# Altium PCB PCB.PcbDoc (part 2 of 3)
Units mm, origin at the board's own origin, x right, y up, seen from the top; angles counter-clockwise.
Board outline 202.56 x 137.16 mm, 4 copper layers (Top Layer, Layer 1, Layer 2, Bottom Layer), stack 0.603 mm thick; 171 components, 95 nets, 481 pads, 76 vias.
Unrouted connection lines stored in the file: 155.
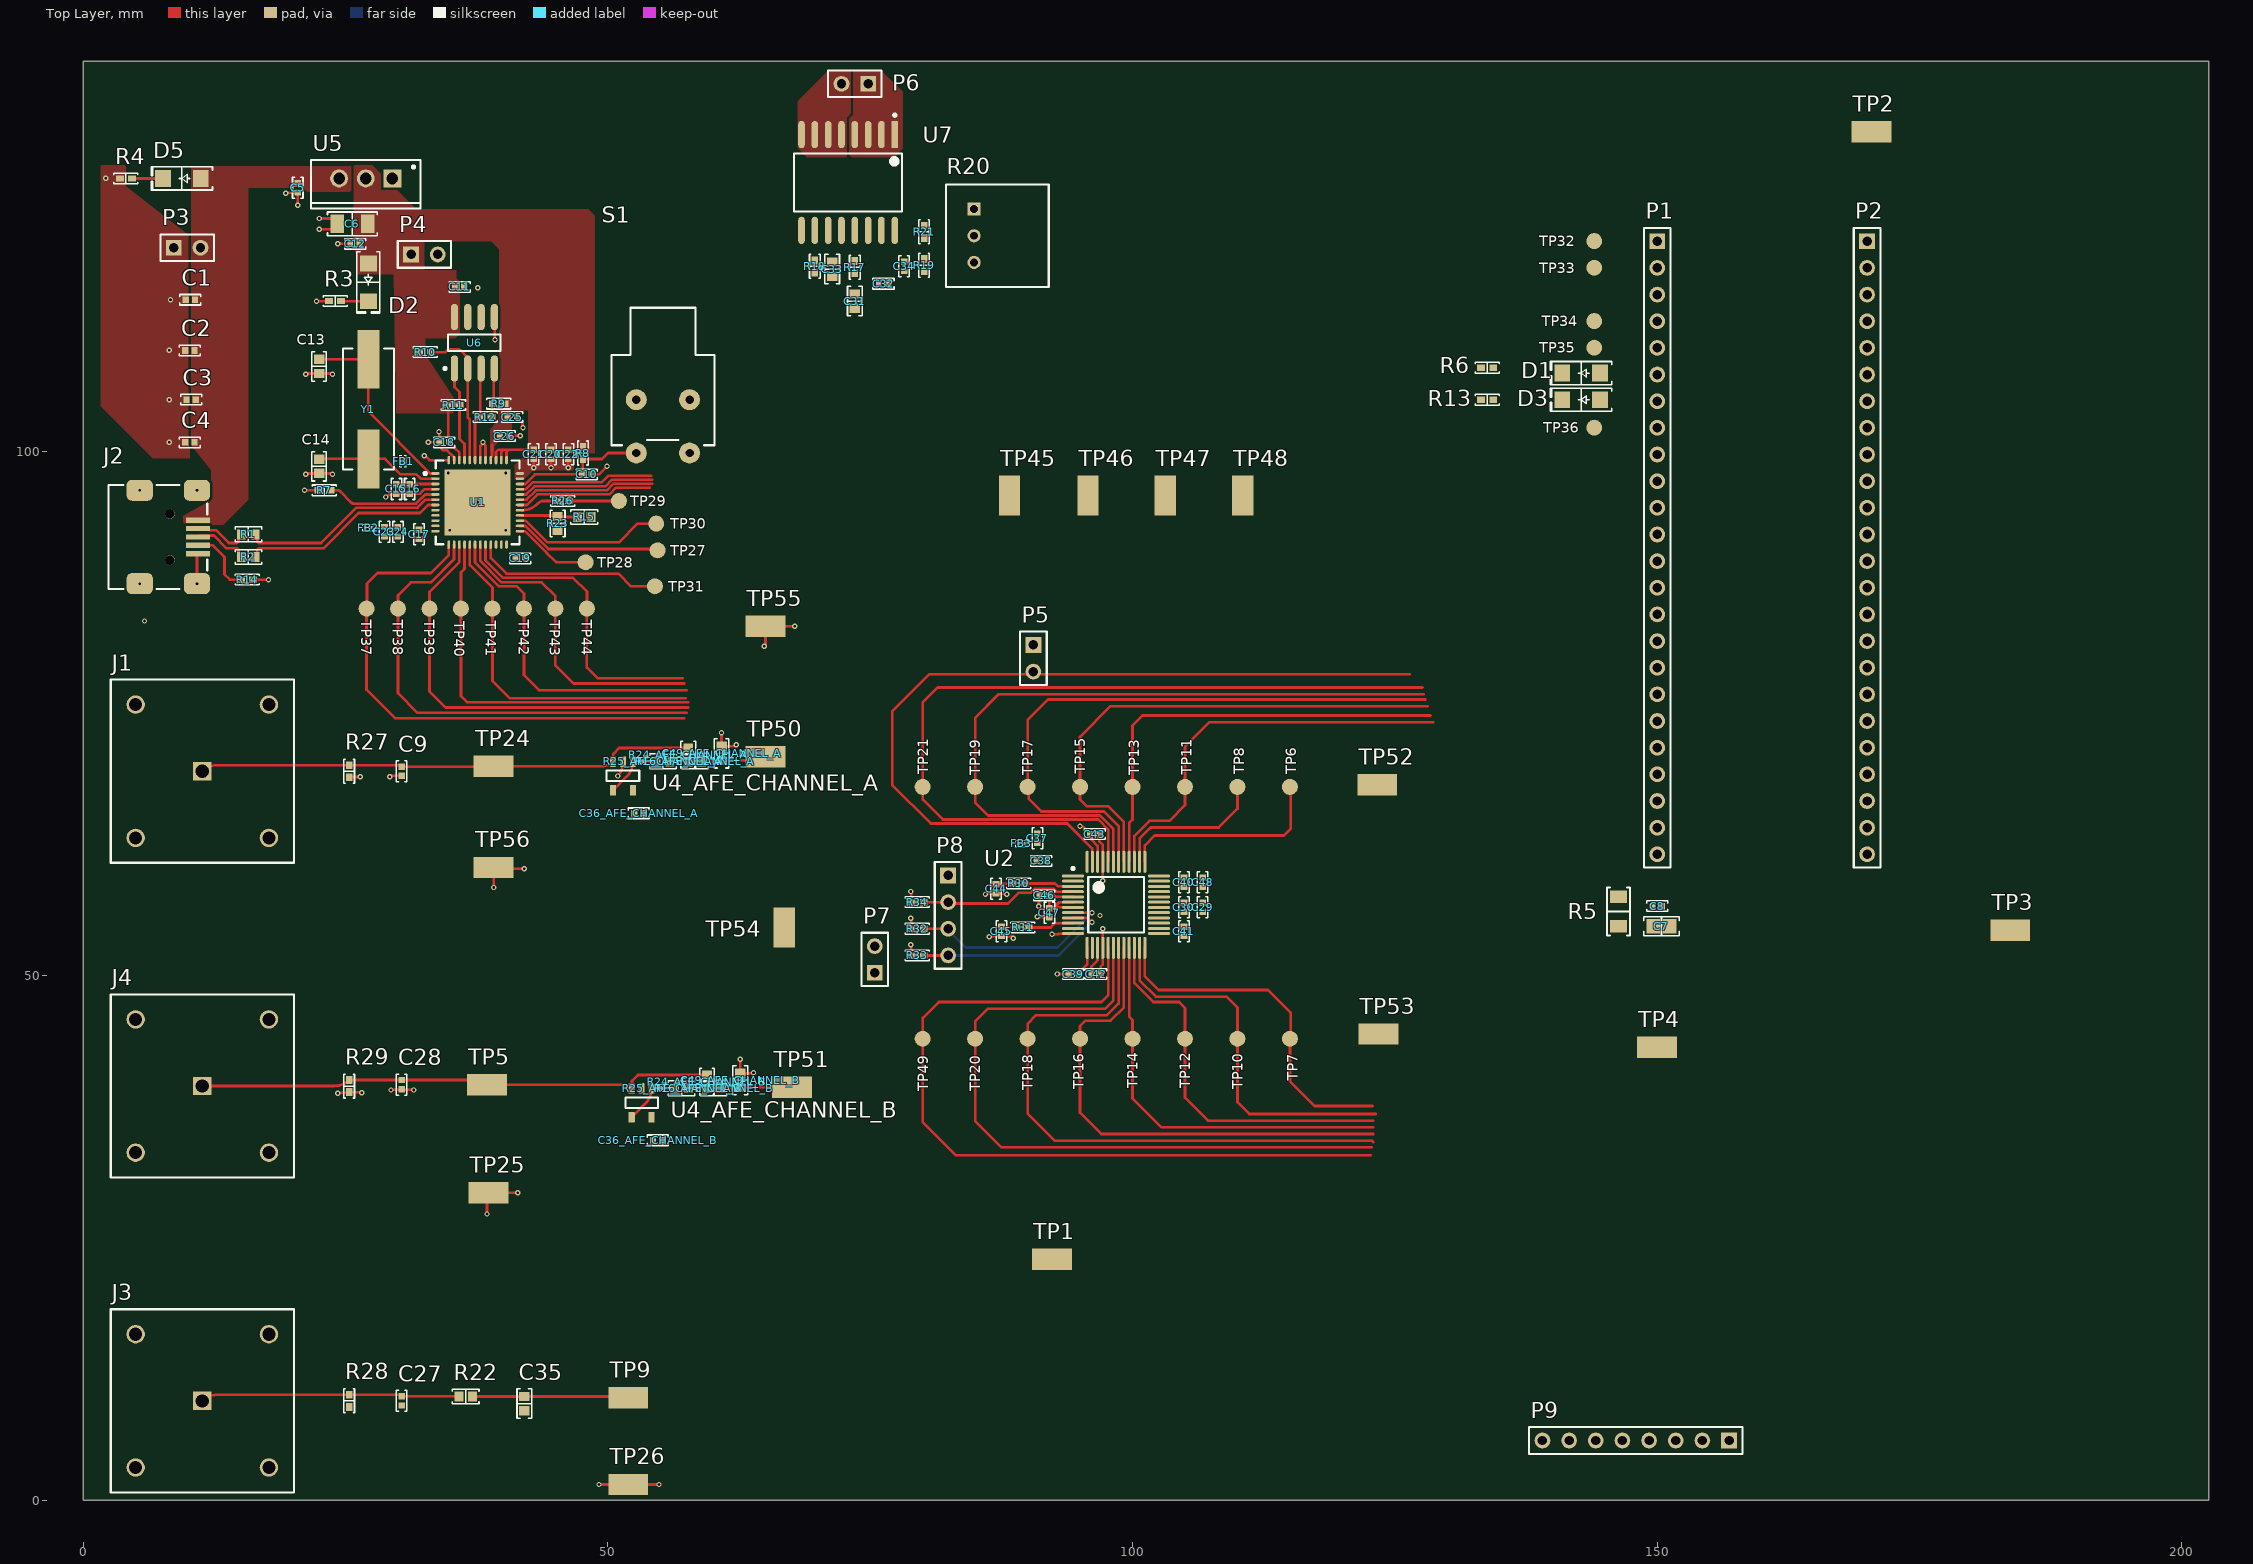
[diagram p0: Top Layer view]

## Part data (continued)
R16_AFE_CHANNEL_A R16_AFE_CHANNEL_B: library part CH0603-50RJNTA, "RES 50 OHM 5% 1/8W 0603", Device Package="0603 (1608 Metric)", manufacturer="Vishay Sfernice", Operating Temperature="-55°C ~ 155°C", Power (Watts)="0.125W, 1/8W", Supplier Device Package=0603, Supplier Part Number 1=716-1163-1-ND, Temperature Coefficient=±100ppm/°C, Tolerance=±5%, componentlink1description=Datasheet, componentlink1url=http://www.vishay.com/docs/53014/ch.pdf, componentlink2description="DigiKey Link", componentlink2url=https://www.digikey.com/en/products/detail/vishay-sfernice/CH0603-50RJNTA/9405753, Composition="Thin Film", Features="RF, High Frequency", Height - Seated (Max)="0.025\" (0.63mm)", lastupdated="2022-09-19 1:22:06 PM", Lifecycle Status=Active, Minimum Order=1, Number of Terminations=2, Package / Case="0603 (1608 Metric)", packaging=TapeAndReel, Part Number=CH0603-50RJNTA, Part Status=Active, partid=12205, price=3.51, Resistance="50 Ohms", series=CH, Size / Dimension="0.060\" L x 0.030\" W (1.52mm x 0.76mm)", Supplier 1=DigiKey
R20: library part CMP-07234-000023-1, "POT 10K OHM 1/4W PLASTIC LINEAR", Max Operating Temperature=125°C, Max Power Dissipation=250mW, Min Operating Temperature=-40°C, Package Quantity=50, Resistance=10kR, Temperature Coefficient=1000ppm/°C, Tolerance=20%, Actuator Diameter=0.125inch, Actuator Length=0.22inch, Composition="Conductive Plastic", Contact Plating=Tin, Mount="Through Hole", Number of Gangs=1, Number of Turns=1, packaging=Bulk, Power Rating=250mW, REACH SVHC="No SVHC", Taper=Linear, Termination=Pin, Type=Potentiometer, Weight=4.5g